# Altium PCB PCB1.PcbDoc (part 2 of 2)
Units mil, origin at the board's own origin, x right, y up, seen from the top; angles counter-clockwise.
Board outline 2604.27 x 2454.27 mil, 4 copper layers (Top Layer, GND, Power, Bottom Layer), stack 53.912 mil thick; 71 components, 89 nets, 388 pads, 132 vias.
Unrouted connection lines stored in the file: 46.
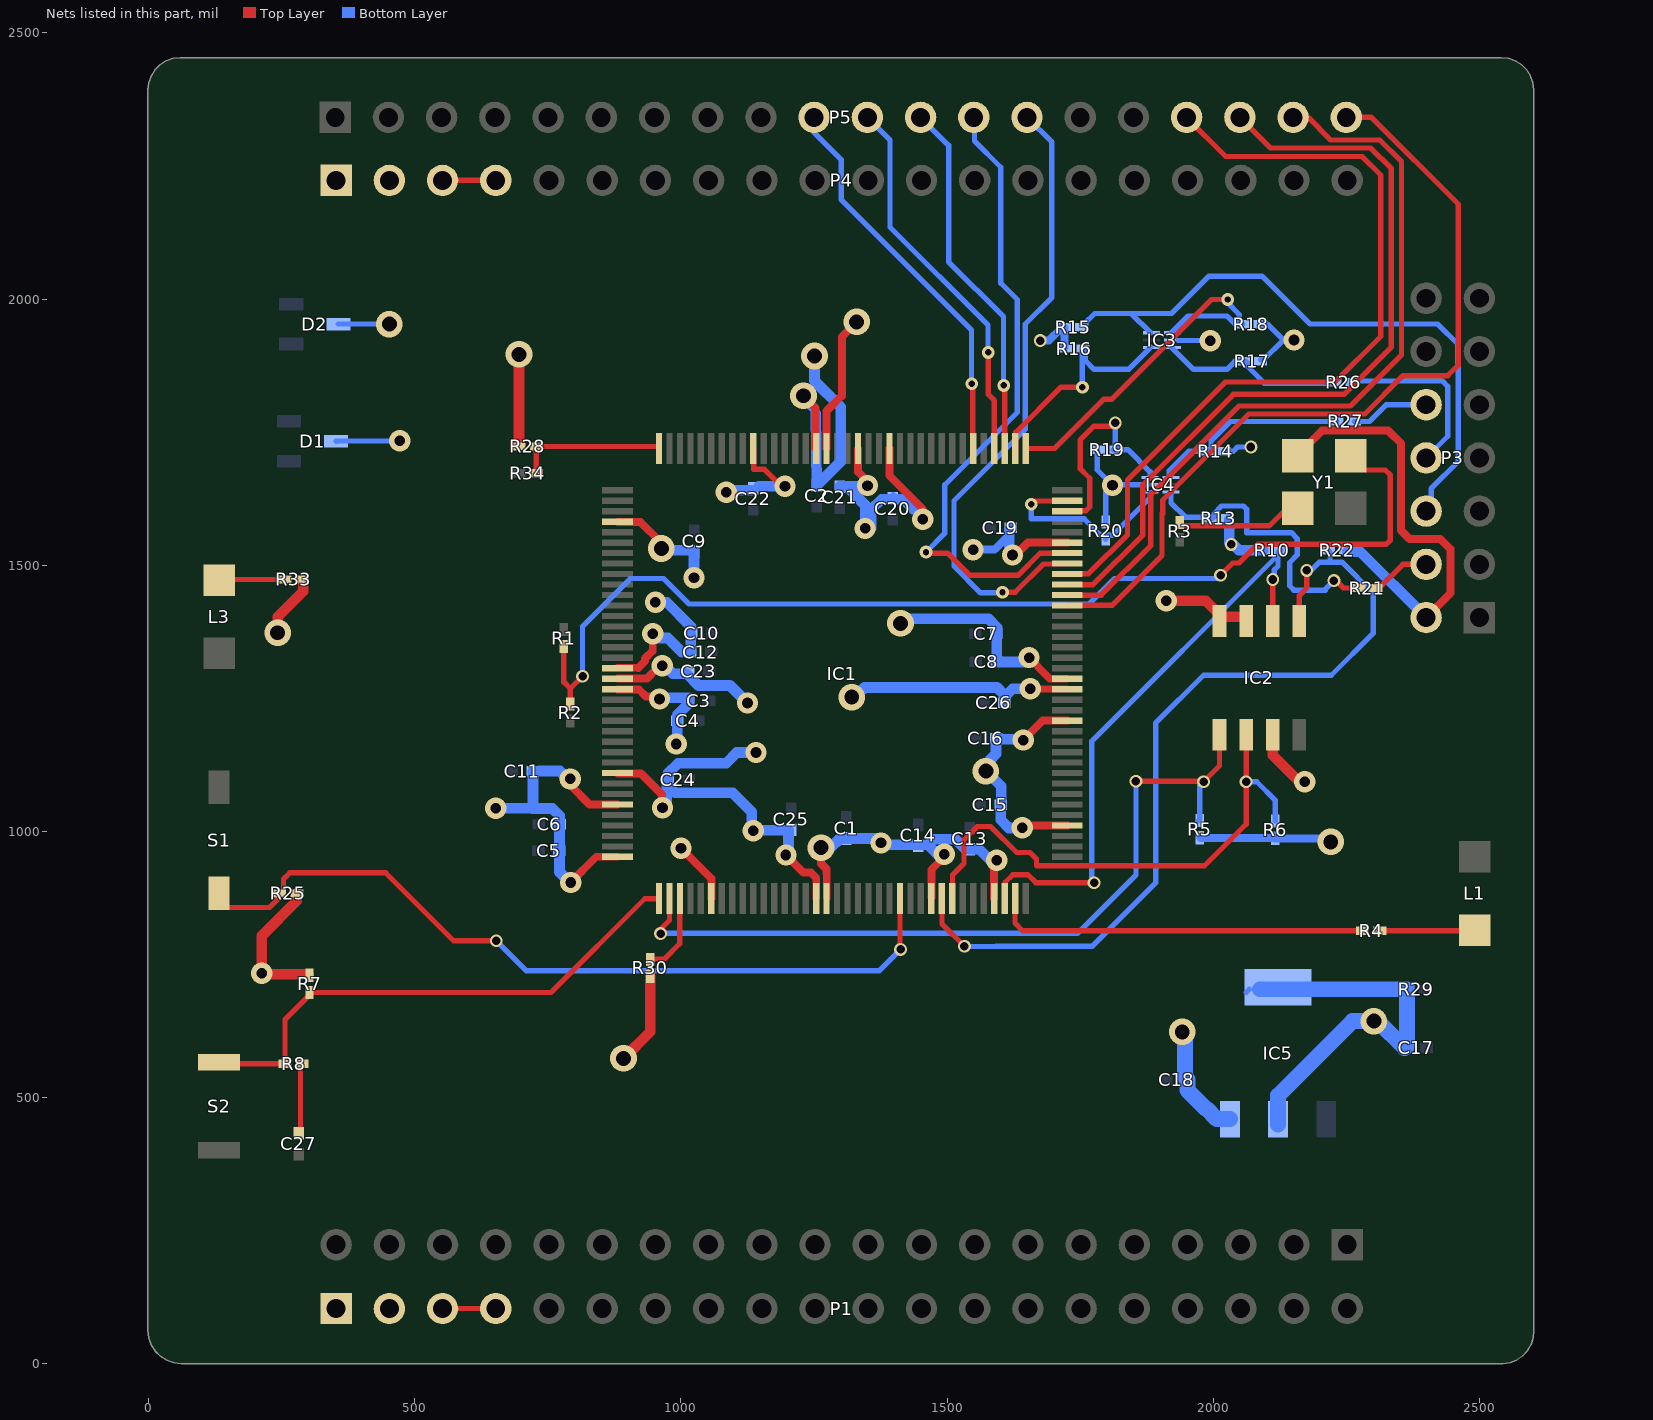
[diagram p4: the nets of this part, all layers, seen from the top]

## Via types
v1: diameter 24, hole 16, Top Layer to Bottom Layer, 29 vias
v2: diameter 40, hole 20, Top Layer to Bottom Layer, 17 vias
v3: diameter 40, hole 20, Power to Bottom Layer, 16 vias
v4: diameter 24, hole 12, Top Layer to Bottom Layer, 15 vias
v5: diameter 50, hole 28, Power to Bottom Layer, 8 vias
v6: diameter 50, hole 28, Top Layer to GND, 8 vias
v7: diameter 40, hole 20, GND to Bottom Layer, 8 vias
v8: diameter 50, hole 28, Top Layer to Power, 7 vias
v9: diameter 40, hole 20, Top Layer to GND, 6 vias
v10: diameter 40, hole 20, Top Layer to Power, 4 vias
v11: diameter 50, hole 28, GND to Bottom Layer, 4 vias
v12: diameter 50, hole 28, Top Layer to Bottom Layer, 3 vias
v13: diameter 24, hole 16, Power to Bottom Layer, 3 vias
v14: diameter 50, hole 25, Top Layer to Power, 2 vias
v15: diameter 24, hole 16, GND to Bottom Layer, 1 vias
v16: diameter 24/24 (per signal layer), hole 16, Top Layer to Bottom Layer, 1 vias

## Nets (pads, with @x,y where several pads share a name; then routed paths per layer and width w, separated by ;. In a path a pad name is that pad's centre, name@x,y a point inside that pad or via, vN(x,y) a via of type N, cw(c..) or ccw(c..) an arc to the next point about the centre after c; other vN are vias at no path point) (continued)
IOB19: IC1.114 P5.10 | length 746.7
  Top Layer w10: v4(1546.64,1840.73) 1548.58,1838.79 1548.58,1720.15 IC1.114@1549.49,1719.24
  Bottom Layer w10: P5.10@1250.31,2341.5 1250.31,2312.69 1301,2262 1301,2187 1546,1942 v4@1546,1840
IOB20: IC1.112 P5.11 | length 721.7
  Top Layer w10: v4(1577.64,1899.73) 1577.64,1820.73 1588.86,1809.51 IC1.112@1588.86,1719.24
  Bottom Layer w10: P5.11@1350.31,2341.5 1350.5,2341.5 1393,2299 1393,2135 1577,1951 v4@1577,1899
IOB21: IC1.111 P5.12 | length 688.3
  Top Layer w10: v4(1606.64,1837.73) 1608.54,1835.83 IC1.111@1608.54,1719.24
  Bottom Layer w10: P5.12@1450.31,2341.5 1503,2288.81 1503,2070 1606,1967 v4@1606,1837
IOB22: IC1.102 P5.13 | length 1223
  Top Layer w10: v4(1460.43,1524.49) 1462.43,1522.49 1500.97,1522.49 1542.21,1481.24 1633.97,1481.24 1675.21,1522.49 IC1.102@1725.8,1522.49
  Bottom Layer w10: v4@1460,1524 1496,1560 1496,1651 1632,1787 1632,1999 1601,2030 1601,2247.77 1551.79,2296.98 1551.79,2340.02 P5.13@1550.31,2341.5
IOB23: IC1.101 P5.14 | length 1195.1
  Top Layer w10: v4(1604.21,1449.24) 1628.21,1449.24 1681.24,1502.28 1725.28,1502.28 IC1.101@1726.18,1503.18
  Bottom Layer w10: v4@1604,1448 1563,1448 1513,1498 1513,1621 1647,1755 1647,1953 1697,2003 1697,2294.81 P5.14@1650.31,2341.5
IOB24: IC1.100 P5.17 | length 1547.4
  Top Layer w10: IC1.100@1725.76,1483.01 1726.66,1483.91 1765.91,1483.91 1839,1557 1839,1660 2023,1844 2229,1844 2315,1930 2315,2233 2280,2268 2023.81,2268 P5.17@1950.31,2341.5
IOB25: IC1.99 P5.18 | length 1509
  Top Layer w10: IC1.99@1725.76,1463.32 1774.32,1463.32 1868,1557 1868,1651 2038,1821 2246,1821 2335,1910 2335,2245 2296,2284 2107.81,2284 P5.18@2050.31,2341.5
IOB26: IC1.98 P5.19 | length 1472.8
  Top Layer w10: IC1.98@1725.76,1443.64 1789.64,1443.64 1883,1537 1883,1633 2049,1799 2258,1799 2354,1895 2354,2258.14 2313.14,2299 2221,2299 2178.92,2341.08 2150.73,2341.08 P5.19@2150.31,2341.5
IOB27: IC1.97 P5.20 | length 1565.7
  Top Layer w10: IC1.97@1725.76,1423.95 1726.66,1424.86 1810.86,1424.86 1904,1518 1904,1598 1905.33,1596.67 1905.33,1622.33 2067,1784 2285,1784 2357,1856 2441,1856 2460.78,1875.78 2460.78,2178.22 2297.5,2341.5 P5.20@2250.31,2341.5
NetC27_2: C27.2 R8.1 | length 133.3
  Top Layer w10: C27.2@282,432.37 285.11,435.48 285.11,560.13 287.98,563 R8.1@288.22,563
NetIC3_3: IC3.3 P3.6 R15.1 | length 1187.2
  Bottom Layer w10: R15.1@1753.22,1953 1757.65,1953 1777.65,1973 1846.1,1973 ; IC3.3@1882.32,1936.78 1846.1,1973 ; P3.6@2400.31,1601.5 2409.69,1610.89 2409.69,1644.16 2460.78,1695.25 2460.78,1914.22 2422,1953 2182,1953 2092,2043 1992,2043 1922,1973 1846.1,1973
NetIC4_1: IC4.1 R14.1 R27.1 | length 373.7
  Bottom Layer w10: IC4.1@1917.64,1666.83 1917.64,1677.64 1954,1714 R14.1@1988.78,1714 1993.21,1714 1996.08,1716.87 1996.08,1733.08 2033,1770 R27.1@2232.78,1770
NetIC4_3: IC4.3 R13.1 R21.1 | length 580.4
  Top Layer w10: v1(2227,1471) 2230.79,1471 2244.79,1457 R21.1@2273.78,1457
  Bottom Layer w10: IC4.3@1921,1636 1921,1617 1947.87,1590.13 R13.1@2001.34,1590.13 ; R13.1@1994.78,1588 1999.21,1588 R13.1@2001.34,1590.13 ; v1(2227,1471) 2211,1455 2211,1453 2151.86,1453 2144,1460.86 2144,1505 2158,1519 2158,1550 2147,1561 2063,1561 2063,1605 2057,1611 2015.9,1611 2002.08,1597.18 2002.08,1590.87 R13.1@2001.34,1590.13
NetL1_1: L1.1 R4.2 | length 179.2
  Top Layer w10: R4.2@2313.22,813 2490.9,813 L1.1@2492,814.1
NetL3_1: L3.1 R33.1 | length 124.2
  Top Layer w10: L3.1@132,1471.9 133.1,1473 R33.1@255.78,1473
NetP1_3: P1.3 P1.4 | length 100
  Top Layer w10: P1.3@552,103 P1.4@652,103
NetP3_4: P3.4 R21.2 | length 120.1
  Top Layer w10: R21.2@2298.22,1458 2313,1458 2356.5,1501.5 P3.4@2400.31,1501.5
NetP3_8: P3.8 R26.2 | length 339.3
  Bottom Layer w10: R26.2@2259.65,1840 2265.65,1846 2431,1846 2441,1836 2441,1742.2 P3.8@2400.31,1701.5
NetP3_10: P3.10 R27.2 | length 161.4
  Bottom Layer w10: R27.2@2265.22,1770 2294,1770 2325.5,1801.5 P3.10@2400.31,1801.5 P3.10@2390.92,1810.89
NetP4_3: P4.3 P4.4 | length 100
  Top Layer w10: P4.3@552,2223 P4.4@652,2223
NetR1_2: R1.2 R2.2 Y1.3 | length 2076.2
  Top Layer w10: R1.2@780,1346.78 780,1280 792,1268 ; R2.2@792,1239.22 792,1268 ; v1(815,1291) 792,1268 ; v1(2014,1481) 2037,1504 2048.5,1504 2083.5,1539 2325,1539 2333,1547 2333,1669.14 2323.43,1678.72 2283.53,1678.72 2259,1703.24 Y1.3@2259,1705.21
  Bottom Layer w10: v1(815,1291) 815,1385 905,1475 967,1475 1015,1427 1767,1427 1815,1475 2008,1475 v1(2014,1481)
NetR3_1: R3.1 Y1.1 | length 241.2
  Top Layer w10: R3.1@1938.87,1582.1 1938.87,1575 1939.87,1574 2106,1574 2138.79,1606.79 Y1.1@2159,1606.79
"S CLOCK": IC1.70 IC2.6 R10.2 | length 1103.8
  Top Layer w10: IC1.70@1608.54,873.73 1609.45,874.64 1609.45,904.04 1623.66,918.24 1652.03,918.24 1667.03,903.24 v1(1776.21,903.24) ; IC2.6@2112,1389.77 IC2.6@2112,1394.77 v1(2112,1473)
  Bottom Layer w10: v1@1772,913 1772.21,913.21 1772.21,1169.43 2115.79,1513 2121.86,1513 ; v1(2112,1473) 2114.68,1475.68 2114.68,1490.68 2121.86,1497.86 2121.86,1513 ; R10.2@2127,1528 2124.74,1528 2121.86,1525.13 2121.86,1513
"S DATA IN": IC1.64 IC2.5 R22.2 | length 1651.1
  Top Layer w10: IC1.64@1490.43,873.73 1490.43,825.94 v1(1532.64,783.73) ; IC2.5@2162,1394.77 2162,1443 2176,1457 v1(2176,1490)
  Bottom Layer w10: v1@1532,783 1532.65,783.01 1592.67,783.67 1772.67,783.67 1892,903 1892,1203 1982,1293 2222,1293 2300.78,1371.78 2300.78,1447.22 2242.3,1505.7 2219.64,1505.7 ; v1(2176,1490) 2184,1490 2199.7,1505.7 2219.64,1505.7 ; R22.2@2216.78,1528 2219.64,1525.14 2219.64,1505.7
"S DATA OUT": IC1.65 IC2.2 R6.2 | length 1002.8
  Top Layer w10: IC1.65@1509.48,873 1510.39,873.91 1510.39,917.89 1532,939.5 1532,984 1557,1009 1582,1009 1631,960 1656,960 1668,948 1668,935 1984,935 2062,1013 v1(2062,1093) IC2.2@2062,1176.23
  Bottom Layer w10: v1(2062,1093) 2082,1093 2117,1058 R6.2@2117,1019.22
S_SELCTn: IC1.38 IC2.1 R5.2 | length 1489.6
  Top Layer w10: v1(961.64,807.73) 961.64,815.73 978.62,832.72 IC1.38@978.62,873.73 ; v1(1855,1094) 1981,1094 v16(1982,1093) 2012,1123 IC2.1@2012,1176.23
  Bottom Layer w10: v1@961,808 1745,808 1855,918 v1(1855,1094) ; R5.2@1972,1019.22 1974.87,1022.09 1974.87,1085.87 v16(1982,1093)
TDO: IC3.6 R17.1 R26.1 | length 342.2
  Bottom Layer w10: IC3.6@1922,1909.22 1963.22,1868 2025.78,1868 2040.78,1883 R17.1@2057,1883 2061.43,1883 2064.3,1880.13 2064.3,1873.82 2096.12,1842 R26.1@2220.21,1842
V12: C17.2 C23.2 C24.2 C25.2 C26.2 IC1.19 IC1.28 IC1.52 IC1.89 IC1.128 IC5.2 IC5.4 R29.2 | length 2587.3
  Top Layer w10: IC1.28@880.46,1109.24 IC1.28@881.36,1108.33 ; IC1.19@880.46,1286.4 IC1.19@881.36,1287.31 ; v2@954.47,1305.5 959.97,1311 v2(964.98,1311) ; v8@1330.21,1956.68 v8(1330.21,1957.24) ; IC1.89@1725.2,1267.48 IC1.89@1725.97,1266.72
  Top Layer w13: v2(1656.45,1267.48) IC1.89@1725.2,1267.48
  Top Layer w14: IC1.52@1254,873.49 1254,912.46
  Top Layer w15: IC1.28@881.36,1108.33 924.67,1108.33 964.21,1068.79 v2@964.21,1058.24 ; IC1.19@881.36,1287.31 911.39,1287.31 911.71,1286.99 935.96,1286.99 v2@954.47,1305.5 ; v2(1197.21,955.24) 1230.46,922 1244.46,922 1254,912.46 ; IC1.128@1273.68,1719 1273.68,1789.72 1302.21,1818.24 1302.21,1928.68 v8@1330.21,1956.68
  Bottom Layer w10: v2@965,1044 965,1045 v2@973.31,1053.31 ; C24.2@972.31,1098.69 C24.2@973.31,1097.69 ; C24.2@973.31,1087.69 C24.2@973.31,1100 ; v3@1133,1004 v3(1136,1001) v3@1137,1002 ; v2@1197,955 v2@1202.16,960.16 ; C25.2@1202.16,998.16 C25.2@1207,1003 ; C25.2@1202.16,1002 C25.2@1202.16,1003 ; v5(1321,1252) 1328,1259 v5@1334,1259 ; 1607.69,1251.69 C26.2@1607.69,1241 1607.69,1256.31 ; IC5.4@2062,697.02 IC5.4@2067.98,703 ; v5(2302,643) v5@2309.72,643 ; C17.2@2359.72,593 C17.2@2361.68,593 C17.2@2364.56,595.87 ; R29.2@2364.56,703 R29.2@2365.78,703
  Bottom Layer w20: v2@970,1311 985,1296 1002.69,1296 1010.97,1296 1033.06,1273.91 1092.09,1273.91 v3(1125,1241) ; v2@973.31,1053.31 C24.2@973.31,1097.69 ; C24.2@973.31,1087.69 989,1072 1097,1072 1133,1036 v3@1133,1004 ; C24.2@975.31,1097 975.31,1108.31 995,1128 1085,1128 1105,1148 v3(1141,1148) ; v3@1137,1002 C25.2@1202.16,1002 ; v2@1202.16,960.16 C25.2@1202.16,998.16 ; v5@1334,1259 1345,1270 1594,1270 1607.69,1256.31 ; 1607.69,1251.69 1623.48,1267.48 v2(1656.45,1267.48)
  Bottom Layer w30: IC5.4@2087.98,703 2364.56,703 C17.2@2364.56,595.87 ; IC5.2@2122,448.98 2122,503 2262,643 v5(2302,643) ; v5@2309.72,643 C17.2@2359.72,593
  other v2: 965.21,1044.24
V33A: C1.2 C2.2 C3.2 C4.2 C5.2 C6.2 C7.2 C8.2 C9.2 C10.2 C11.2 C12.2 C13.2 C14.2 C18.2 D1.1 IC1.4 IC1.18 IC1.20 IC1.31 IC1.36 IC1.42 IC1.53 IC1.63 IC1.69 IC1.90 IC1.129 IC2.3 IC2.7 IC2.8 IC3.5 IC4.5 IC5.3 P1.1 P1.2 P3.2 R5.1 R6.1 R7.2 R10.1 R13.2 R14.2 R15.2 R16.2 R17.2 R18.2 R19.2 R20.2 R22.1 R25.1 R30.1 R33.2 Y1.4 | length 6247.4
  Top Layer w10: v10(212,733) v10@213.89,731.11 ; R33.2@288.22,1473 R33.2@290.11,1471.11 ; R7.2@300.11,731.11 R7.2@302,729.22 ; v2@792.21,1086.24 v2(792.21,1098.24) ; IC1.18@880.46,1306.09 IC1.18@881.36,1306.99 ; IC1.4@880.46,1581.68 IC1.4@881.36,1580.77 ; v12@961.21,1530.24 v12@961.21,1543.79 ; IC1.42@1057.03,873.61 IC1.42@1057.15,873.49 ; IC1.129@1253.09,1719.91 IC1.129@1254,1719 ; IC1.53@1273.68,873.49 1273.68,873.94 1273.9,873.73 IC1.53@1274.8,874.64 ; v2@1495,952.31 v2(1495,956.66) ; v2@1588.65,940.68 v2(1593.21,945.24) ; v10(1912,1433) 1953.46,1433 ; IC2.7@2062,1389.77 IC2.7@2062,1403 ; IC2.3@2112,1176.23 IC2.3@2113.79,1174.44 ; Y1.4@2159,1705.21 Y1.4@2159,1707.18 ; v10@2162,1093 v10(2172,1093)
  Top Layer w14: IC1.18@881.36,1306.99 919.99,1306.99 ; IC1.53@1273.68,873.94 1273.68,921.06 ; v2(1654.21,1326.24) 1688.12,1291.32 ; 1683.2,1296.23 1693.03,1286.4 IC1.90@1724.95,1286.4
  Top Layer w15: v2@792.21,1086.24 828.03,1050.43 IC1.31@880.67,1050.43 ; v2(792.64,903.73) 840.91,952 IC1.36@880.67,952 ; IC1.20@880.46,1266.72 920.74,1266.72 934.21,1253.24 v2@951.21,1253.24 ; IC1.4@881.36,1580.77 924.23,1580.77 v12@961.21,1543.79 ; 919.99,1306.99 932.48,1319.48 932.48,1324.46 947,1338.98 v2(947,1371) ; v10(1000,968) 1057.03,910.97 IC1.42@1057.03,873.61 ; v12(1230.21,1818.24) 1253.09,1795.36 IC1.129@1253.09,1719.91 ; v8(1263.21,969) 1263.21,939.42 1273.68,928.95 1273.68,921.06 ; IC1.63@1470.54,875.33 1470.54,927.42 1495,951.89 v2@1495,952.31 ; IC1.69@1588.65,873.49 v2@1588.65,940.68 ; Y1.4@2159,1707.18 2205,1753.18 2328.82,1753.18 2353,1729 2353,1565 2369,1549 2427,1549 2446,1530 2446,1447.2 P3.2@2400.31,1401.5
  Top Layer w20: v10(212,733) 212,803 278.22,869.22 R25.1@278.22,883 ; v10@213.89,731.11 R7.2@300.11,731.11 ; v8(242,1373) 242,1403 290.11,1451.11 R33.2@290.11,1471.11 ; v8(892,573) 942,623 R30.1@942,726.78 ; v10(1912,1433) 1986,1433 2016,1403 IC2.7@2062,1403 ; IC2.3@2112,1181.23 2112,1143 v10@2162,1093
  Bottom Layer w10: D1.1@352,1733 352.32,1733.32 471.03,1733.32 v3(471.35,1733.65) ; 721.37,1043 721.69,1042.69 722,1043 ; C11.2@721.69,1113 C11.2@722,1112.69 ; C11.2@722,1113 C11.2@723.65,1113 ; C5.2@771.69,963 C5.2@771.84,963.16 ; v2@787,1098 v2@802,1098 ; v3(952,1430) 973,1430 ; v12@963,1531 v12@965.84,1528.16 ; C4.2@991.81,1208 C4.2@991.81,1207 ; C4.2@993.06,1208.25 C4.2@992.81,1208 ; 1002,1336 C12.2@1017.31,1336 C12.2@1018.33,1337.05 ; C10.2@1018.33,1370.64 C10.2@1019.34,1371.66 1019.34,1383.66 ; v12@1230,1818 1230,1808.19 1253.38,1784.81 ; v3@1263,969 v3@1281.65,969 ; v3@1367.69,986.31 v3(1376,978) v3@1379.69,974.31 ; v5(1412.5,1390.5) v5@1421,1399 ; C14.2@1446,972.31 1466.31,972.31 ; v2@1486.63,952 v2@1495,952 ; C13.2@1534.69,966.31 C13.2@1543,966.31 ; v2@1582.18,945 v2@1593,945 ; C7.2@1593.69,1366 C7.2@1598.69,1371 ; v2@1646,1318 v2@1654,1326 ; R15.2@1716.35,1947 R15.2@1720.78,1947 ; R16.2@1720.78,1909 R16.2@1722.78,1907 ; R19.2@1782.28,1714.5 1782.28,1678.72 v3@1810,1651 ; R20.2@1798,1581.22 1798,1637 v3(1811,1650) v3@1810,1651 ; v3@1805.12,1651 v3@1810,1651 ; IC4.5@1878.63,1651 v3@1810,1651 ; IC3.5@1934.43,1922.25 1993.75,1922.25 v3(1994.5,1921.5) ; v5(1942,623) v5@1946.84,618.16 ; C18.2@1946.84,537.84 C18.2@1951.69,533 ; R5.1@1975,987.78 R5.1@1976,986.78 ; 1987.16,477.84 1992.39,472.61 ; R14.2@2021.22,1714 2038,1714 2046,1722 v13(2071,1722) ; R13.2@2027.22,1588 2027.74,1588 R13.2@2030.61,1585.13 ; v13@2030.61,1542.39 v13(2034,1539) v13@2037.79,1539 ; R17.2@2089.44,1885.87 2094.87,1885.87 v3@2132,1923 ; R18.2@2092,1953 2102,1953 v3@2132,1923 ; R6.1@2117,986.26 R6.1@2117,986.78 ; v3(2152,1923) v3@2132,1923 ; v5@2214.74,986.26 v5(2221,980) ; R22.1@2249.22,1528 R22.1@2251.93,1525.29 ; C4.2@991.81,1207 991.81,1202.5 992.81,1201.5 C4.2@992.81,1208 ; C4.2@991.81,1207 C4.2@992.81,1208
  Bottom Layer w15: v13(1675,1922) 1691.35,1922 R15.2@1716.35,1947 ; R16.2@1720.78,1909 R15.2@1720.78,1947 ; R5.1@1976,986.78 R6.1@2117,986.78 ; R6.1@2117,986.26 v5@2214.74,986.26
  Bottom Layer w20: v3(652,1043) 721.37,1043 ; 721.69,1042.69 758.31,1042.69 771.84,1029.16 C5.2@771.84,963.16 ; 722,1043 C11.2@722,1112.69 ; 733.97,1113 772,1113 v2@787,1098 ; C5.2@771.69,963 771.69,923.31 v2@792,903 ; v2@944,1363 975,1363 1002,1336 ; v2@959.81,1250.5 C3.2@1013.81,1250.5 ; v12@965.84,1528.16 1024.5,1528.16 v3(1024.5,1476.5) ; 973,1430 1019.34,1383.66 ; v3(991,1164) 993.31,1166.31 C4.2@993.31,1208 993.31,1218.31 1014.31,1239.31 C3.2@1014.31,1251 ; C12.2@1018.33,1337.05 C10.2@1018.33,1370.64 ; v5(1251,1893) 1251,1846 1300,1797 1300,1694.68 C2.2@1255,1649.69 1253.38,1784.81 ; v3@1281.65,969 1298.97,986.31 C1.2@1311,986.31 v3@1367.69,986.31 ; v3@1379.69,974.31 1464.31,974.31 1475,985 1516,985 C13.2@1534.69,966.31 ; v5@1421,1399 1578,1399 1594.65,1382.35 C7.2@1594.65,1371 ; 1466.31,972.31 v2@1486.63,952 ; C13.2@1543,966.31 1560.86,966.31 v2@1582.18,945 ; C7.2@1593.69,1366 C8.2@1593.69,1318 v2@1646,1318 ; v13@2030.61,1542.39 R13.2@2030.61,1585.13 ; v13@2037.79,1539 2048.79,1528 R10.1@2094.56,1528 ; R22.1@2251.93,1525.29 2276.52,1525.29 P3.2@2400.31,1401.5
  Bottom Layer w30: C18.2@1946.84,537.84 v5@1946.84,618.16 ; C18.2@1951.69,533 1951.69,513.31 1987.16,477.84 ; 1987.75,478.43 2007.2,458.98 IC5.3@2031.45,458.98
  other v2: 959.81,1248.5
  other v3: 1263.21,969
  other v12: 963.21,1531.24
VIO(B): C15.2 C16.2 C19.2 C20.2 C21.2 C22.2 D2.1 IC1.76 IC1.86 IC1.103 IC1.122 IC1.125 IC1.135 P4.1 P4.2 R28.1 | length 1725.6
  Top Layer w10: IC1.135@1136.1,1719.24 1136.8,1718.55 1136.8,1679.96 1156.95,1679.96 v2@1192.43,1644.49 ; IC1.125@1332.74,1719 IC1.125@1333.07,1718.67 ; v2(1350.43,1649.49) v2@1350.43,1657.61 ; v2(1623,1519) v2@1628.79,1519 ; v2(1641.21,1006.24) v2@1645.78,1010.81
  Top Layer w15: IC1.125@1333.07,1718.67 1333.07,1674.96 v2@1350.43,1657.61 ; IC1.122@1391.8,1719 1391.8,1668.12 1454.21,1605.7 v2(1454.21,1586.24) ; v2@1628.79,1519 1652.1,1542.31 IC1.103@1725.97,1542.31 ; v2(1643.21,1171.24) 1679.63,1207.66 IC1.86@1725.97,1207.66 ; v2@1645.78,1010.81 IC1.76@1725.97,1010.81
  Top Layer w20: R28.1@695.56,1726 v8(695.56,1896)
  Bottom Layer w10: D2.1@356.29,1953 v5(452,1953) ; v3@1084,1636 v3(1085,1637) ; C22.2@1132.16,1640.84 C22.2@1136,1644.69 1139.69,1641 1146.69,1648 ; C21.2@1298.66,1648.34 C21.2@1298,1647.69 1311.31,1647.69 ; v2@1349.34,1648.34 v2@1350,1649 ; v3@1352,1563.32 v3@1357.74,1569.06 ; C20.2@1398,1624.03 C20.2@1398,1626 ; C20.2@1399,1632 1399,1630.03 C20.2@1401.5,1627.53 ; v8(1573,1113) 1580.65,1120.65 v5@1580.65,1133.94 ; C16.2@1592,1166.31 C16.2@1598.69,1173 ; C15.2@1600.69,1050 C15.2@1601.69,1051 ; v2@1617,1535.86 1622.86,1530 v2@1629,1530 ; C19.2@1617,1567.31 C19.2@1619.69,1570 1619.69,1559.69 ; v2@1641,1173 v2@1643,1171
  Bottom Layer w15: v3(1549,1529) 1589,1529 1619.69,1559.69
  Bottom Layer w20: v3@1103.16,1640.84 C22.2@1132.16,1640.84 ; 1146.69,1648 v2@1195,1648 ; C21.2@1298.66,1648.34 v2@1349.34,1648.34 ; 1311.31,1647.69 1346,1613 v3(1346,1569) ; v3@1357.74,1569.06 1357.74,1604.74 1377.03,1624.03 1398,1624.03 1417.68,1624.03 1436.72,1605 1440,1605 ; v8(1573,1113) 1601.69,1084.31 C15.2@1601.69,1051 ; v5@1580.65,1133.94 1592,1145.28 C16.2@1592,1166.31 ; C16.2@1598.69,1173 v2@1641,1173 ; C15.2@1600.69,1050 1600.69,1021.31 1616,1006 v2@1641,1006 ; v2@1617,1535.86 C19.2@1617,1567.31
  other v2: 1195.43,1648.49
  other v5: 1573,1113
"X DONE": IC1.71 R4.1 | length 704.7
  Top Layer w10: IC1.71@1627.59,873 1627.59,827.41 1642,813 R4.1@2280.78,813
"X M1": IC1.60 R25.2 S1.S0 | length 1533
  Top Layer w10: S1.S0@132,883 132,871.19 146.69,856.5 227.16,856.5 243.82,873.16 243.82,880.13 R25.2@246.7,883 ; R25.2@245.78,883 R25.2@246.7,883 ; v1(653,794) 573,794 445,922 265,922 253,910 253,885.87 250.13,883 R25.2@246.7,883 ; IC1.60@1411.69,873.73 1411.64,873.68 1411.64,778.73 v1(1412.64,777.73)
  Bottom Layer w10: v1(653,794) 709,738 1373,738 v1@1412,777
"X PROG": IC1.37 R7.1 R8.2 S2.2 | length 1005.4
  Top Layer w10: S2.2@132,565.68 134.68,563 R8.2@255.78,563 255.78,646.13 302,692.35 302,693.91 304.87,696.78 755.78,696.78 932,873 IC1.37@958.3,873
"X TCK": IC1.109 IC3.4 R18.1 | length 704.6
  Top Layer w10: IC1.109@1647.91,1719.24 1702.18,1719.24 1794.43,1811.49 1809.43,1811.49 1997.01,1999.08 v4(2027.43,1999.08)
  Bottom Layer w10: IC3.4@1921.69,1936.78 1952.91,1968 2025.78,1968 2040.78,1953 R18.1@2051.99,1953 ; v4@2027,1998.59 2027,1993.18 2049.12,1971.06 2049.12,1955.87 R18.1@2051.99,1953 ; R18.1@2055.78,1953 R18.1@2051.99,1953
"X TDI": IC1.110 IC3.1 R16.1 | length 437
  Top Layer w10: IC1.110@1628.23,1719.24 1629.13,1720.15 1629.13,1749.55 1714.07,1834.49 v4(1754.43,1834.49)
  Bottom Layer w10: v4@1754,1834 1754,1905.78 R16.1@1755.22,1907 1757.2,1907 1760.08,1904.13 1760.08,1884.13 1776.2,1868 1841.41,1868 IC3.1@1882.63,1909.22
"X TDO": IC1.106 IC4.6 R19.1 | length 406.6
  Top Layer w10: IC1.106@1725.97,1601.36 1726.87,1602.27 1761.24,1602.27 1768.21,1609.24 1768.21,1663.24 1750.21,1681.24 1750.21,1735.24 1776.21,1761.24 1810.21,1761.24 v1(1816.21,1767.24)
  Bottom Layer w10: R19.1@1812.22,1717 R19.1@1817.22,1717 R19.1@1821.65,1717 ; v1@1816,1767 1816,1722.65 R19.1@1821.65,1717 ; IC4.6@1881.63,1666 1881.63,1675.37 1840,1717 R19.1@1821.65,1717
"X TMS": IC1.107 IC4.4 R20.1 | length 379.7
  Top Layer w10: v4(1658.21,1614.24) 1664.35,1620.39 1725.28,1620.39 IC1.107@1726.18,1621.29
  Bottom Layer w10: v4@1658,1614 1658,1587 1757.9,1587 1788.82,1556.08 1795.13,1556.08 R20.1@1798,1553.21 ; R20.1@1798,1548.78 R20.1@1798,1553.21 ; IC4.4@1881.63,1636 1881.63,1626.63 1811.08,1556.08 1800.87,1556.08 R20.1@1798,1553.21
X_HSWAPEN: IC1.144 R28.2 R34.2 | length 288.5
  Top Layer w10: R28.2@723.73,1718.51 R28.2@728.22,1718.51 ; R34.2@728.22,1673 R28.2@728.22,1718.51 ; IC1.144@958.3,1718.51 958.3,1722.09 957.39,1723 R28.2@728.22,1723 R28.2@728.22,1718.51
X_INIT: IC1.39 R30.2 | length 148.9
  Top Layer w10: R30.2@945,760 969,760 997.67,788.67 IC1.39@997.67,873
pads on no net: D1.2 D2.2 IC1.15 IC1.16 IC1.17 IC1.21 IC1.22 IC1.24 IC1.26 IC1.27 IC1.29 IC1.30 IC1.32 IC1.33 IC1.34 IC1.35 IC1.59 IC1.72 IC1.74 IC1.75 IC1.78 IC1.79 IC1.80 IC1.81 IC1.82 IC1.83 IC1.84 IC1.85 IC1.87 IC1.88 IC1.92 IC1.93 IC1.104 IC1.105 IC1.120 IC1.121 IC1.141 IC1.142 IC1.143 P3.12 P3.14
copper on no net: | length 132
  Top Layer w20: v14(747,2018) v14(879,2018)

## Polygon pours and split planes (outlines as drawn)
GND on GND (split plane): 2550.5,2432.51 2559.1,2429.57 2566.84,2424.79 2573.32,2418.41 2578.21,2410.75 2581.28,2402.19 2582.49,2392.11 2582.49,62.25 2581.65,51.89 2578.97,43.36 2574.45,35.65 2568.33,29.13 2560.92,24.14 2552.57,20.92 2542.92,19.52 62.12,19.52 51.55,20.69 42.59,23.81 34.55,28.84 27.83,35.54 22.77,43.56 19.63,52.51 18.42,63.05 18.42,2391.77 19.56,2401.93 22.56,2410.5 27.4,2418.19 33.82,2424.61 41.51,2429.45 50.08,2432.45 60.24,2433.59 2540.25,2433.59
V33A on Power (split plane): 23.4,1814.4 25.05,1813.29 27,1812.9 812,1812.9 813.8,1813.26 815.6,1812.9 1049.9,1812.9 1049.9,1434 1050.29,1432.05 1051.4,1430.4 1056.49,1425.3 1058.15,1424.19 1060.1,1423.8 1431.9,1423.8 1431.9,1117 1432.29,1115.05 1433.4,1113.4 1491.4,1055.4 1493.05,1054.29 1495,1053.9 1613,1053.9 1614.95,1054.29 1616.6,1055.4 1663,1101.79 1947.4,817.4 1949.05,816.29 1951,815.9 1986.9,815.9 1986.9,386 1986.9,382.11 1953.89,349.1 1293.11,349.1 1177.1,465.11 1177.1,1054.89 1274.11,1151.9 1354,1151.9 1355.95,1152.29 1357.6,1153.4 1381.6,1177.4 1382.71,1179.05 1383.1,1181 1383.1,1364 1382.71,1365.95 1381.6,1367.6 1375.6,1373.6 1373.95,1374.71 1372,1375.1 1125,1375.1 1123.05,1374.71 1121.4,1373.6 1103.4,1355.6 1097.4,1349.61 1097.4,1349.6 1065.4,1317.6 1041.4,1293.6 1040.29,1291.95 1039.9,1290 1039.9,903 1040.29,901.05 1041.4,899.4 1056.9,883.89 1056.9,329 1056.9,22 1057.29,20.05 1057.65,19.52 62.12,19.52 51.55,20.69 42.59,23.81 34.55,28.84 27.83,35.54 22.77,43.56 19.63,52.51 18.42,63.05 18.42,1819.37
V33A on Power (split plane): 22.57,2410.51 27.4,2418.19 33.82,2424.61 41.5,2429.44
V12 on Power (split plane): 1373.9,1890 1374.29,1888.05 1374.9,1887.13 1374.9,1830 1375.29,1828.05 1376.4,1826.4 1434.4,1768.4 1436.05,1767.29 1438,1766.9 1671.89,1766.9 1749.9,1688.89 1749.9,1606 1750.29,1604.05 1751.4,1602.4 1834.9,1518.89 1834.9,1134 1835.29,1132.05 1836.4,1130.4 2052.4,914.4 2054.05,913.29 2056,912.9 2057.15,913.13 2070.88,899.4 2072.54,898.29 2074.49,897.9 2564.69,897.9 2565.08,895.95 2566.19,894.3 2567.84,893.19 2569.79,892.8 2574.89,892.8 2582.49,885.2 2582.49,62.25 2581.65,51.89 2578.97,43.36 2576.04,38.36 2563.66,25.99 2560.92,24.14 2552.57,20.92 2542.92,19.52 1071.69,19.52 1067.1,24.11 1067.1,329 1067.1,886 1066.71,887.95 1065.6,889.6 1050.1,905.11 1050.1,1287.89 1072.6,1310.4 1104.6,1342.4 1104.61,1342.4 1110.6,1348.4 1127.11,1364.9 1369.89,1364.9 1372.9,1361.89 1372.9,1183.11 1351.89,1162.1 1272,1162.1 1270.05,1161.71 1268.4,1160.6 1168.4,1060.6 1167.29,1058.95 1166.9,1057 1166.9,463 1167.29,461.05 1168.4,459.4 1287.4,340.4 1289.05,339.29 1291,338.9 1956,338.9 1957.95,339.29 1959.6,340.4 1995.6,376.4 1996.71,378.05 1997.1,380 1997.1,816.39 1998.6,817.4 1999.71,819.05 2000.1,821 1999.71,822.95 1998.6,824.6 1996.95,825.71 1995,826.1 1953.11,826.1 1670.21,1109 1676.6,1115.4 1677.71,1117.05 1678.1,1119 1678.1,1451 1678.1,1638 1677.71,1639.95 1676.6,1641.6 1637.6,1680.6 1635.95,1681.71 1634,1682.1 1408.11,1682.1 1293.1,1797.11 1293.1,1992.89 1338.11,2037.9 1373.9,2037.9
VIO(B) on Power (split plane): 806.9,1940 807.29,1938.05 808.4,1936.4 810.05,1935.29 812,1934.9 812.5,1935 813,1934.9 1162.68,1934.9 1163.3,1934.28 1163.3,1678.96 1163.29,1678.95 1162.9,1677 1163.29,1675.05 1164.4,1673.4 1166.05,1672.29 1168,1671.9 1631.89,1671.9 1667.9,1635.89 1667.9,1451 1667.9,1121.11 1661.86,1115.07 1660.05,1114.71 1658.4,1113.6 1657.29,1111.95 1656.93,1110.14 1610.89,1064.1 1497.11,1064.1 1442.1,1119.11 1442.1,1429 1441.71,1430.95 1440.6,1432.6 1438.95,1433.71 1437,1434.1 1436.51,1434 1062.21,1434 1060.1,1436.11 1060.1,1818 1059.71,1819.95 1058.6,1821.6 1056.95,1822.71 1055,1823.1 815.6,1823.1 813.8,1822.74 812,1823.1 29.11,1823.1 25.6,1826.6 24.03,1827.66 24.03,2397.55 60.05,2433.57 60.24,2433.59 806.9,2433.59
V33A on Power (split plane): 2550.5,2432.51 2559.1,2429.57 2566.84,2424.79 2573.32,2418.41 2578.21,2410.75 2581.28,2402.19 2582.49,2392.11 2582.49,899.62 2580.6,901.51 2575.8,906.31 2575.6,906.6 2575.31,906.8 2573.64,908.47 2571.98,909.58 2570.03,909.97 2568.08,909.58 2566.43,908.47 2566.18,908.1 2076.6,908.1 2059.6,925.09 2057.95,926.2 2056,926.58 2054.85,926.36 1845.1,1136.11 1845.1,1521 1844.71,1522.95 1843.6,1524.6 1760.1,1608.11 1760.1,1691 1759.71,1692.95 1758.6,1694.6 1677.6,1775.6 1675.95,1776.71 1674,1777.1 1440.11,1777.1 1385.1,1832.11 1385.1,1907 1384.71,1908.95 1384.1,1909.87 1384.1,2040.21 1384.1,2043 1383.71,2044.95 1382.6,2046.6 1380.95,2047.71 1379,2048.1 1336,2048.1 1334.05,2047.71 1332.4,2046.6 1284.4,1998.6 1283.29,1996.95 1282.9,1995 1282.9,1795 1283.29,1793.05 1284.4,1791.4 1393.69,1682.1 1173.49,1682.1 1173.49,1936.4 1173.11,1938.35 1172,1940 1168.4,1943.6 1166.74,1944.71 1164.79,1945.1 817.1,1945.1 817.1,2433.59 2540.25,2433.59

## Other copper
Top Layer:
  pour cut-out: -130,865
Power (plane layer: these items are gaps in the copper):
  lines w10: 18.93,1827.66 18.93,2399.67 62.27,2443 812,2443 812,1940 ; 22,1823 27,1818 177,1818 342,1818 507,1818 812,1818 ; 813,1940 1164.79,1940 1168.4,1936.4 1168.4,1677 ; 815.6,1818 1055,1818 1055,1434 1060.1,1428.9 1172,1428.9 1225.23,1428.9 1331.68,1428.9 1384.9,1428.9 1436.9,1428.9 ; 1168,1677 1277,1677 1410,1677 1634,1677 1673,1638 1673,1451 1673,1119 1613,1059 1495,1059 1437,1117 1437,1429 ; 1379,1890 1379,2040.21 1379,2043 1336,2043 1288,1995 1288,1795 1406,1677 ; 1380,1907 1380,1830 1438,1772 1674,1772 1755,1691 1755,1606 1840,1521 1840,1134 2056,918 2056,921.49 2074.49,903 2572,903 ; 1616,11.21 1616,4 1615,3 ; 1662,1110 1951,821 1995,821 ; 1972,3 2556.05,3 2601.06,48.01 2601.06,873.84 ; 1992,386 1992,380 ; 1992,820.51 1992,380 ; 2569.79,897.9 2577,897.9 2601.06,873.84 ; 2570.03,904.87 2601.06,873.84 ; 1615,3 2547.89,3 2601.06,56.17 2601.06,873.84 ; 1615,3 1081,3 1062,22 1062,329 1062,886 1045,903 1045,1290 1069,1314 1101,1346 1107,1352 1125,1370 1141,1370 1372,1370 1378,1364 1378,1181 1354,1157 1272,1157 1172,1057 1172,463 1291,344 1956,344 1992,380

## Text inside footprints (layer, text, board x,y; h text height)
P3: Top Overlay "2" at 2420.31,1301.5 h50 r90; Top Overlay "1" at 2520.31,1301.5 h50 r90; Top Overlay "13" at 2522,2058 h50 r90; Top Overlay "14" at 2422,2058 h50 r90